# EAGLE board ckc2Board (EAGLE 7.7.0)
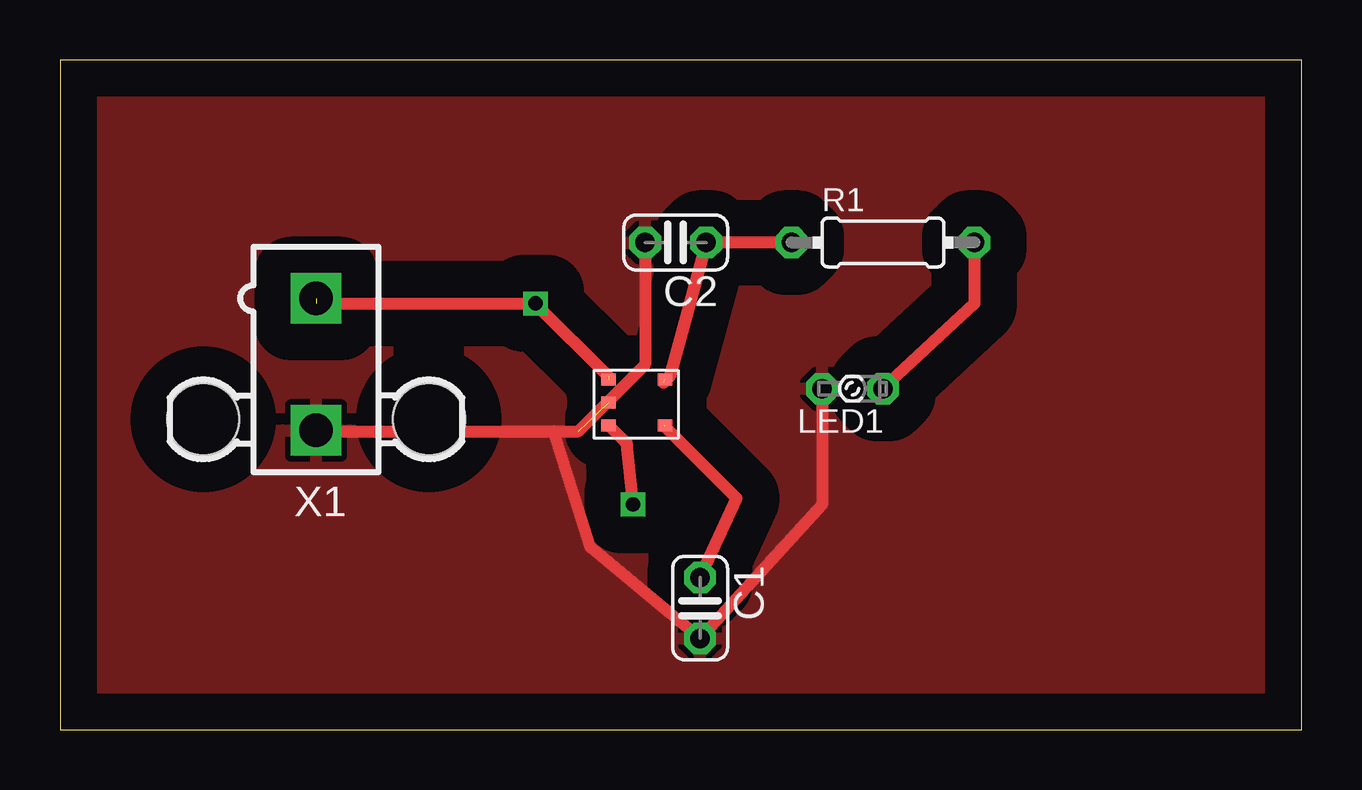
[diagram p0: board, top side]
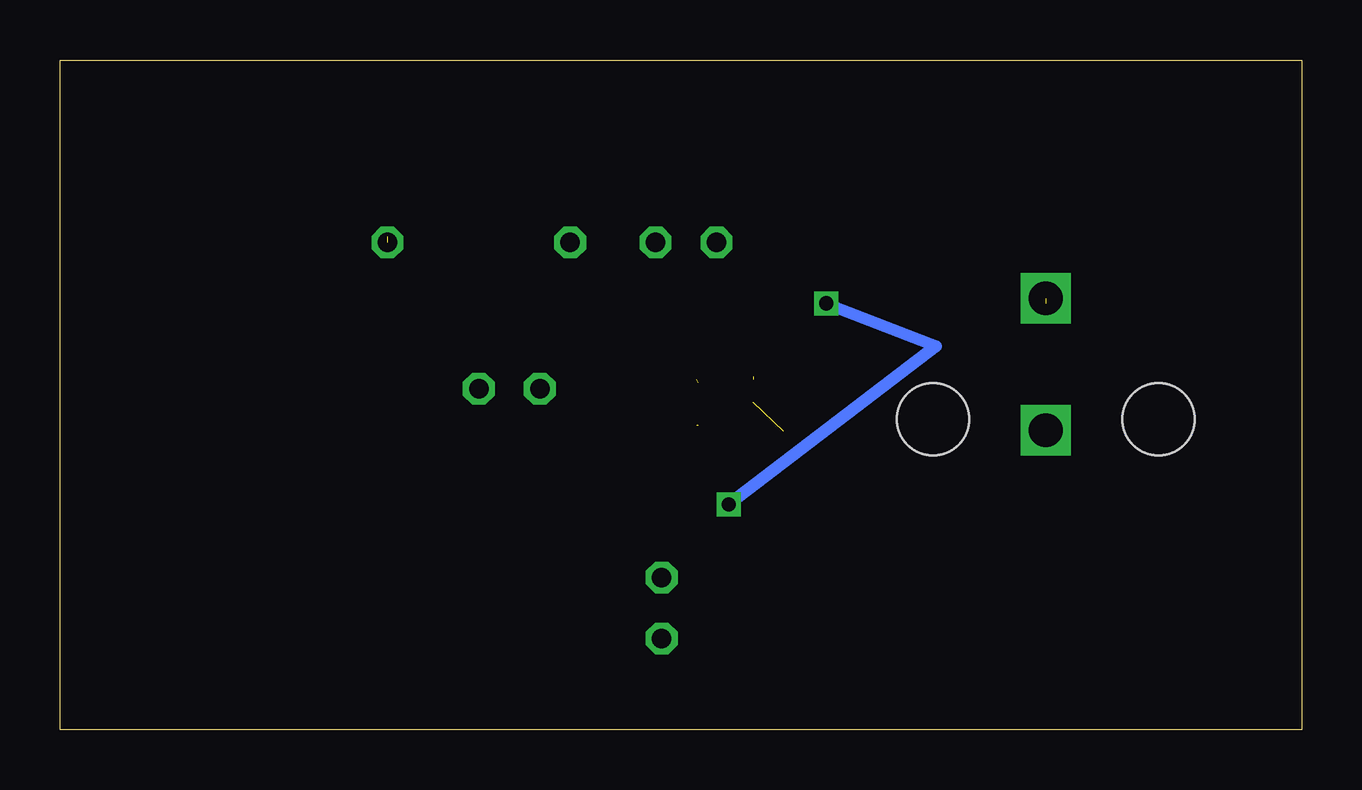
[diagram p1: board, bottom side, seen from below]

Size 51.74 x 27.93 mm. Coordinates in mm from the lower left corner, seen from the top.
Outline: 0,0 51.74,0 51.74,27.93 0,27.93 0,0
Copper layers (1*16): Top 0.035mm / dielectric 1.5mm / Bottom 0.035mm
Design rules "default": minimum track width 10mil, minimum drill 24mil, track to track 8mil, track to pad 8mil, pad to pad 8mil, via to via 8mil, smd to smd 8mil, copper to edge 40mil, drill to drill 8mil, minimum pad ring 10mil, minimum via ring 8mil, stop-mask expansion 4mil, vias tented up to drill 0mil, thermal gap 10mil

## Footprints (pad centres in the part's own frame; a part is rotated, then mirrored left to right if it is on the bottom)
C025-024X044 = drill 0.813 octagon: 1 -1.27,0; 2 1.27,0
LSU260 = drill 0.813 octagon: A -1.27,0; K 1.27,0
0204/7 = drill 0.813 octagon: 1 -3.81,0; 2 3.81,0
TPS799 = smd 0.6 x 0.5: EN 0,0; GND 0,0.95; IN 0,1.9; NR 2.35,0; OUT 2.35,1.9
5566-2 = drill 1.4 square: 1 0,-2.75; 2 0,2.75 | hole 3: 4.7,2.29; -4.7,2.29

## Placement (x,y rotation side)
C1  [C025-024X044]  26.67,5.08 270 top
C2  [C025-024X044]  25.65,20.32 180 top
LED1  [LSU260]  33.02,14.22 180 top
R1  [0204/7]  34.29,20.32 0 top
U$1  TPS799  [TPS799]  22.86,12.7 0 top
X1  5566-2  [5566-2]  10.67,15.24 180 top

## Library data of the parts
C1 C2 R1 = rcl
LED1 = led
U$1 = tps799ckc2
X1 = con-molex; OC_FARNELL: 1822072; OC_NEWARK: unknown

## Nets
GND: C1.2 C2.2 LED1.K U$1.GND X1.2
N$2: U$1.EN U$1.IN X1.1
N$4: C1.1 U$1.NR
N$5: LED1.A R1.2
N$6: C2.1 R1.1 U$1.OUT

## Tracks (layer width: path | path; a pad name or v marks a point on that pad's centre or on a via)
GND  (1 unrouted)
  Top 0.508: C2.2 24.38,15.24 21.59,12.45 20.57,12.45 | 10.67,12.45 20.57,12.45 | 20.57,12.45 22.1,7.62 C1.2 31.75,9.4 LED1.K
  pour Top (isolate 1.524): 0,27.94 51.82,27.94 51.82,0 0,0
N$2  (via drill 0.6)  (2 unrouted)
  Top 0.508: 10.67,17.78 v19.81,17.78 22.86,14.73 | v23.88,9.4 23.62,11.94 U$1.EN
  Bottom 0.508: v19.81,17.78 15.24,16 v23.88,9.4
N$4  (1 unrouted)
  Top 0.508: C1.1 28.19,9.65 25.15,12.7
N$5  (1 unrouted)
  Top 0.508: 38.1,20.57 38.1,17.78 LED1.A
N$6  (1 unrouted)
  Top 0.508: R1.1 C2.1 25.4,14.73 25.15,14.48